# Altium PCB PCB1.PcbDoc
Units mil, origin at the board's own origin, x right, y up, seen from the top; angles counter-clockwise.
Board outline 3014.38 x 3014.38 mil, 2 copper layers (Top Layer, Bottom Layer); 25 components, 7 nets, 53 pads, 1 vias.
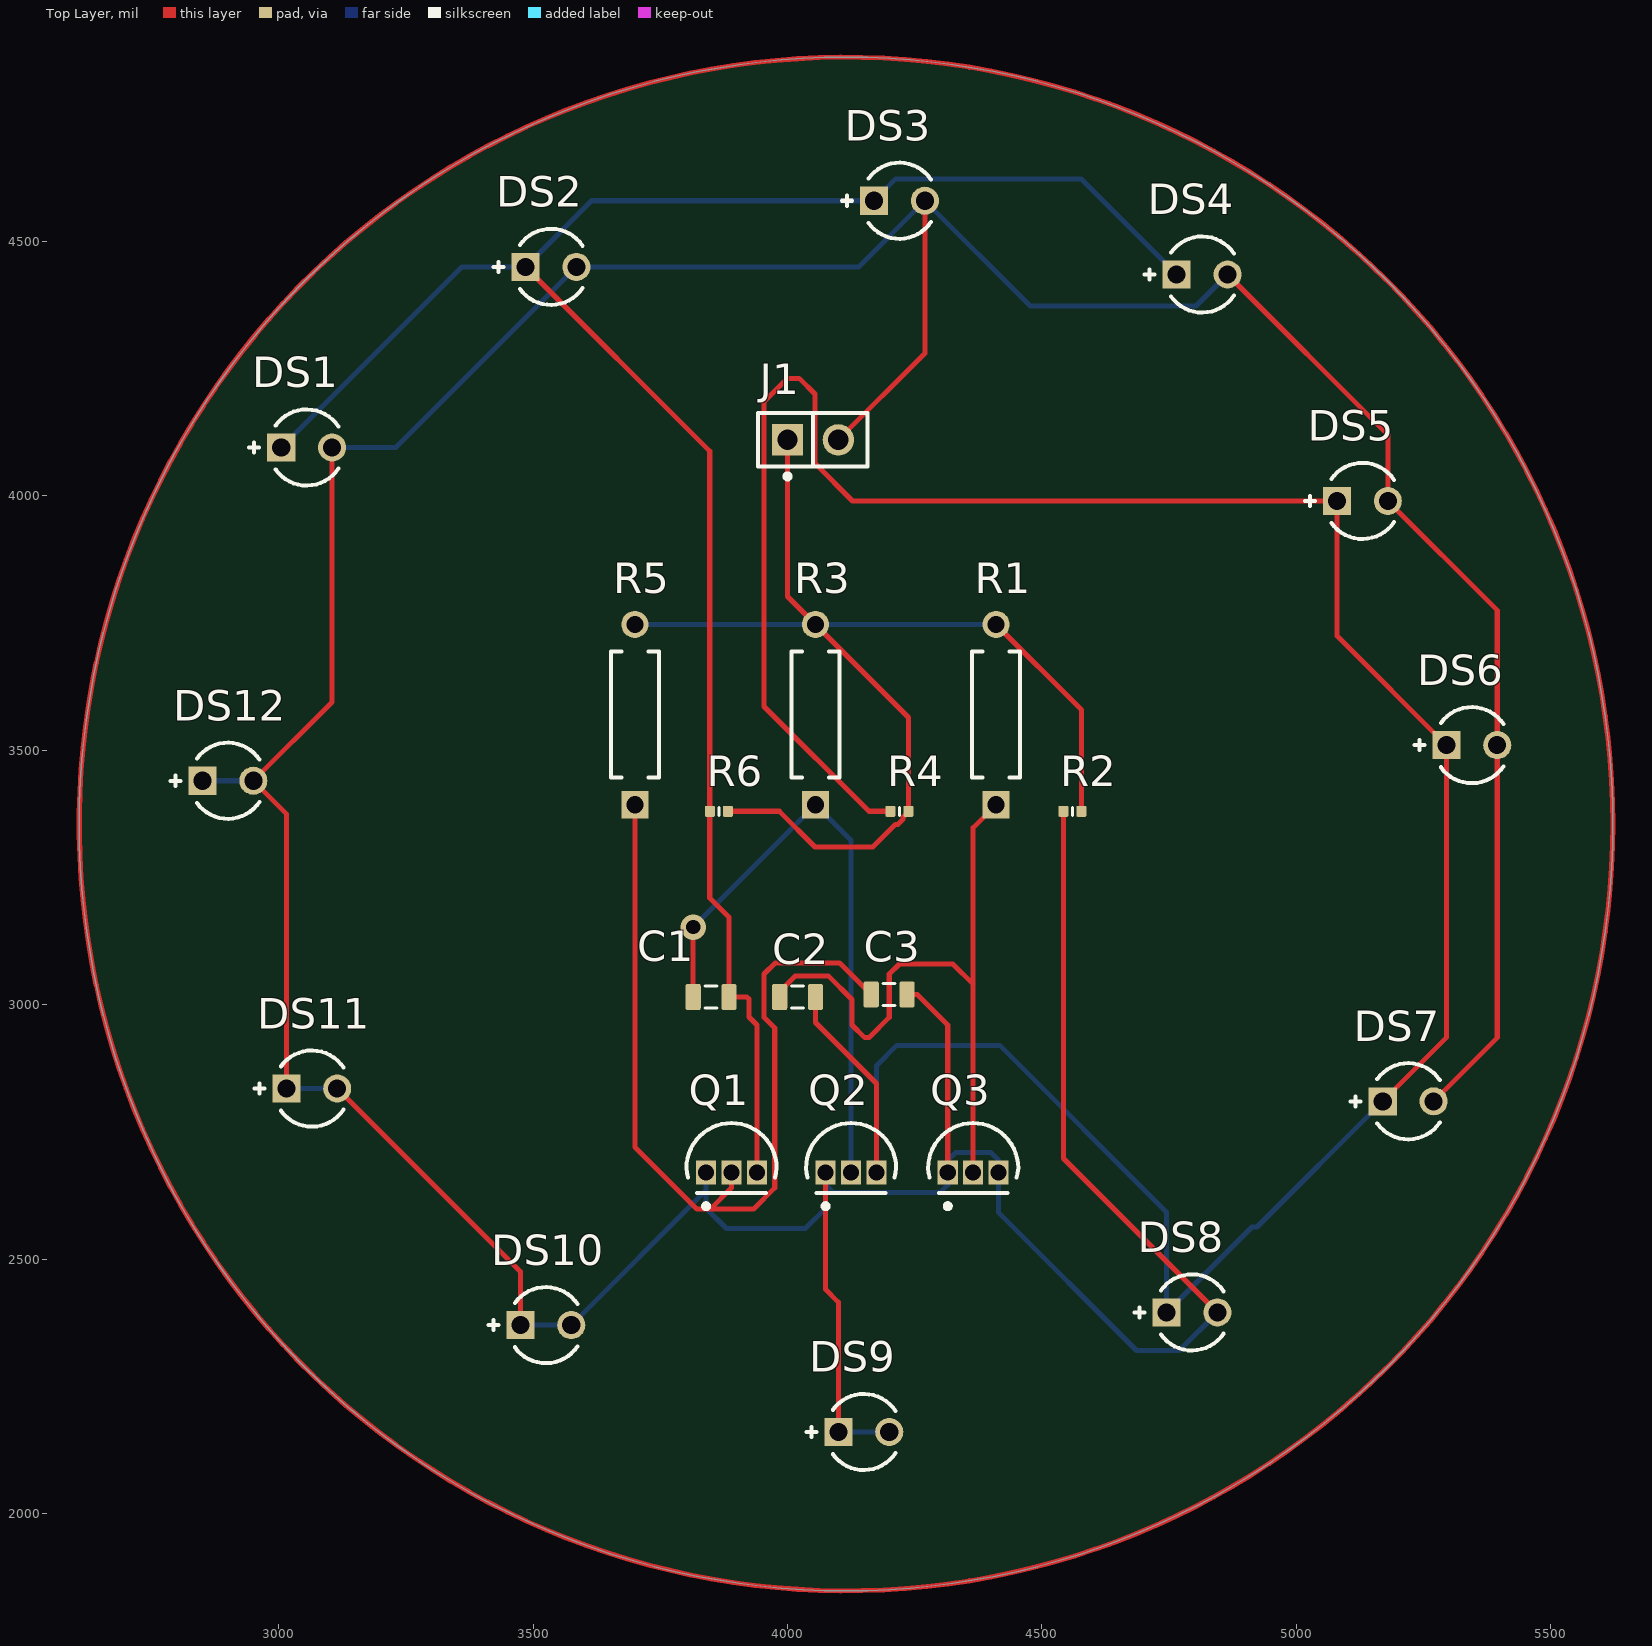
[diagram p0: Top Layer view]
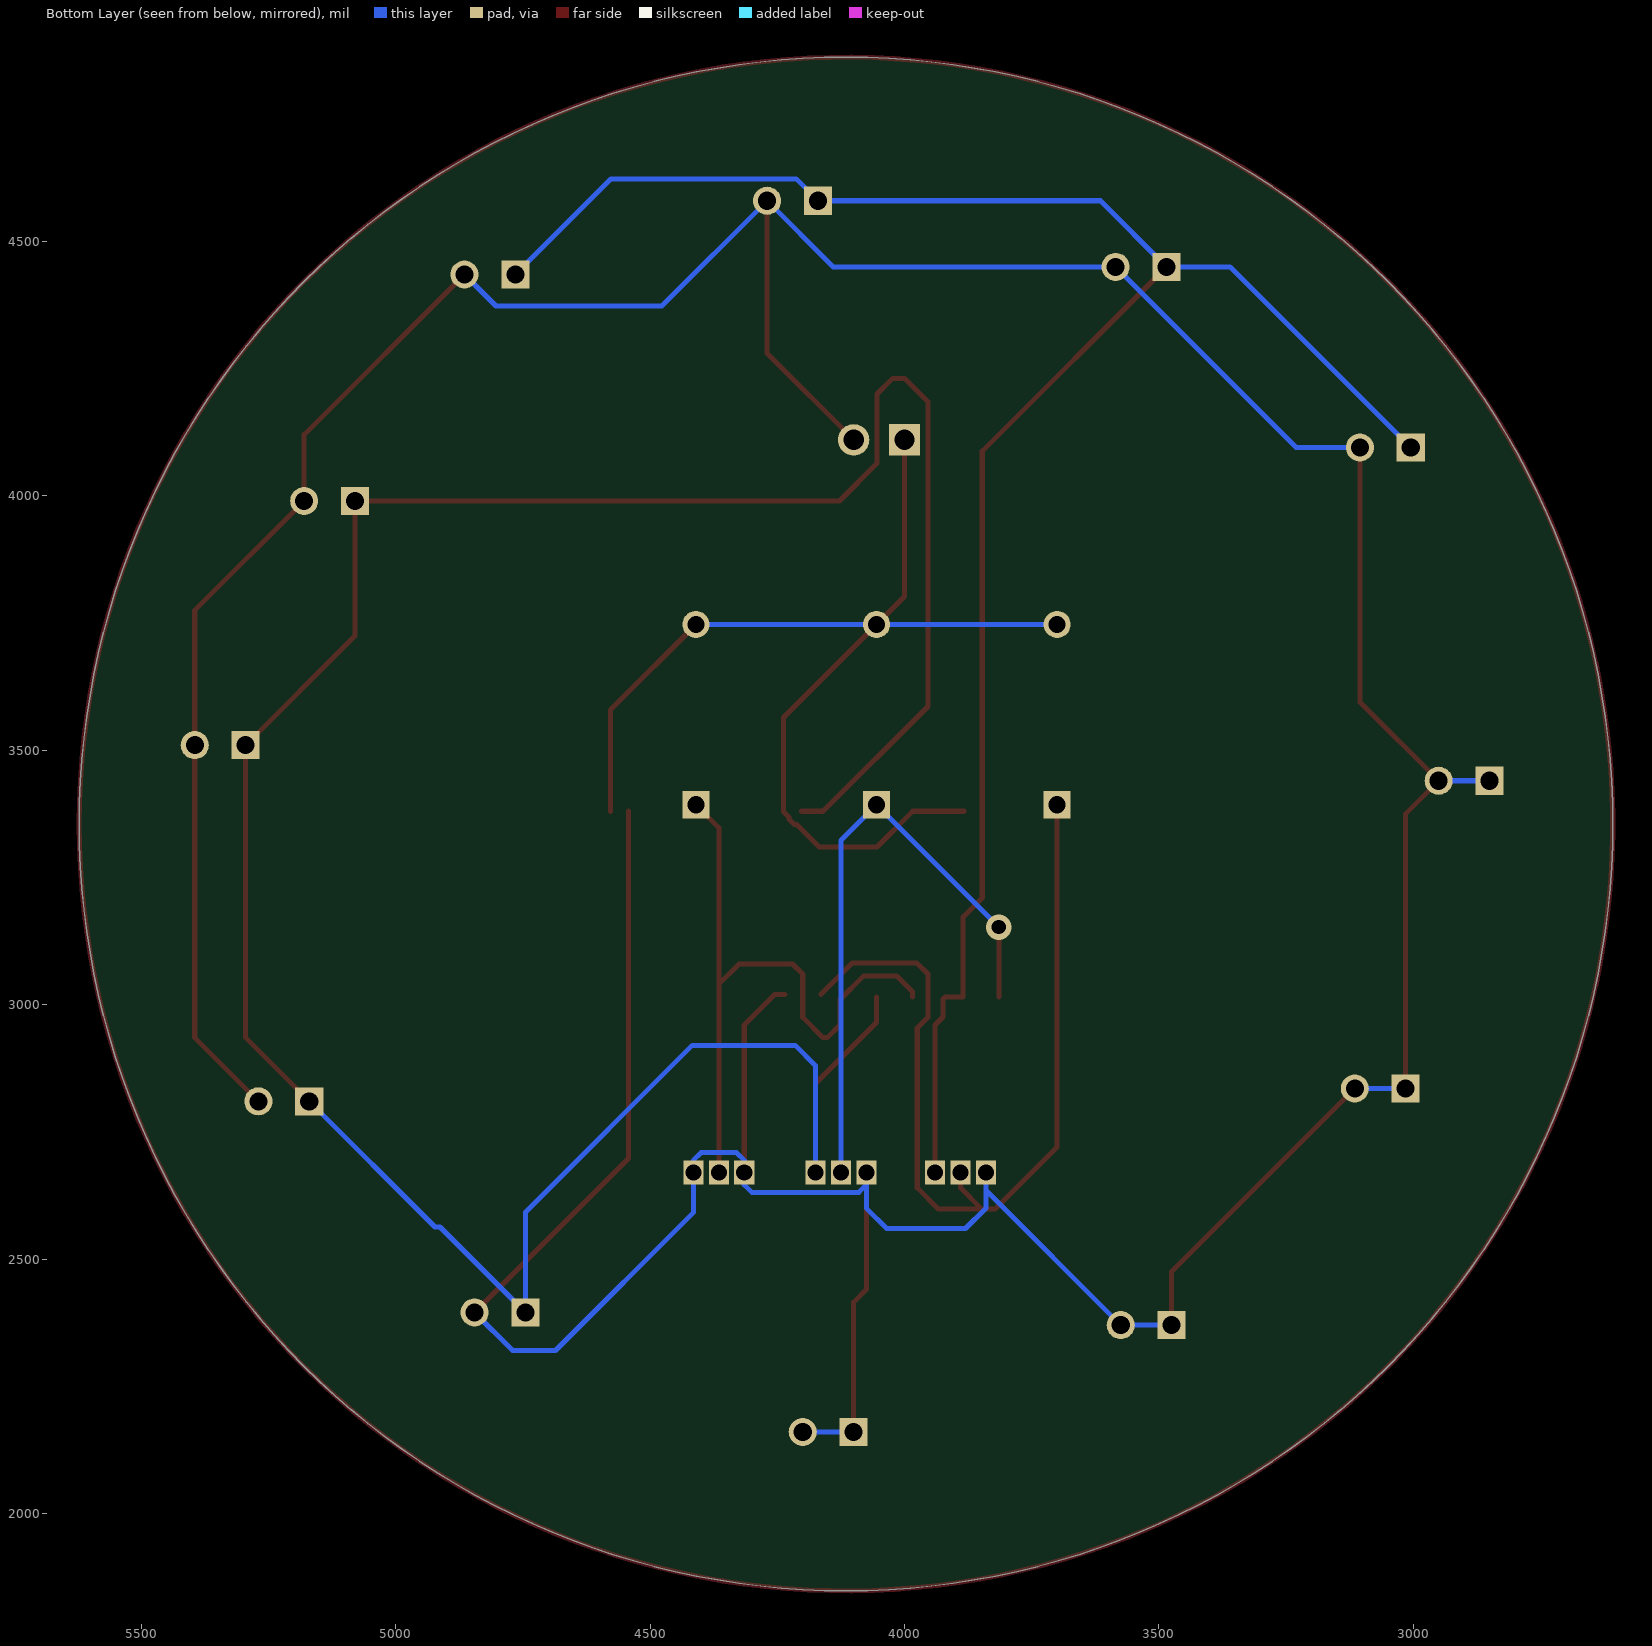
[diagram p1: Bottom Layer view, seen from below]

## Layer stack, top to bottom
Top Solder: solder mask 0.4, Solder Resist, Dk 3.5
Top Layer: signal copper 1.4
Dielectric 1: dielectric 12.6, FR-4, Dk 4.8
Bottom Layer: signal copper 1.4
Bottom Solder: solder mask 0.4, Solder Resist, Dk 3.5

## Board outline
2607.81,3355 ccw(c4115,3355) 4115,1847.81 ccw(c4115,3355) 5622.19,3355 ccw(c4115,3355) 4115,4862.19 ccw(c4115,3355)

## Design rules (kind name [scope] priority, off if disabled: settings)
Clearance [All] p1: gap=10 ignorepadtopadclearanceinfootprint=FALSE
PolygonConnect [All] p1: connectstyle=Relief reliefconductorwidth=10 reliefentries=4 polygonreliefangle="90 Angle" airgapwidth=10
RoutingVias [All] p1: holewidth=28 width=50 viastyle="Through Hole" minholewidth=28 minwidth=50 maxholewidth=28 maxwidth=50
SilkToSolderMaskClearance [IsPad] p1: minsilkscreentomaskgap=4 clearancetoexposedcopper=TRUE
SolderMaskExpansion [All] p1: expansion=0 istentingtop=FALSE
Width [All] p1: maxlimit=10 minlimit=10 preferedwidth=10
29 further rules are at their usual default settings.

## Components (designator, comment, footprint, x,y, rotation, side; value= is the part's Value field where it differs from the comment)
C1 "Capacitor 22µF +/-40% 16V 0805" CAPC0805(2012)145_L 3850,3015 r0 top value=22µF
C2 "Capacitor 22µF +/-40% 16V 0805" CAPC0805(2012)145_L 4020,3015 r0 top value=22µF
C3 "Capacitor 22µF +/-40% 16V 0805" CAPC0805(2012)145_L 4199.96,3020 r0 top value=22µF
DS1 "LTL-1CHE" INDPR60-254-520X380X650 3055,4095 r0 top
DS2 "LTL-1CHE" INDPR60-254-520X380X650 3535,4450 r0 top
DS3 "LTL-1CHE" INDPR60-254-520X380X650 4220,4580 r0 top
DS4 "LTL-1CHE" INDPR60-254-520X380X650 4815,4435 r0 top
DS5 "LTL-1CHE" INDPR60-254-520X380X650 5130,3990 r0 top
DS6 "LTL-1CHE" INDPR60-254-520X380X650 5345,3510 r0 top
DS7 "LTL-1CHE" INDPR60-254-520X380X650 5220,2810 r0 top
DS8 "LTL-1CHE" INDPR60-254-520X380X650 4795,2395 r0 top
DS9 "LTL-1CHE" INDPR60-254-520X380X650 4150,2160 r0 top
DS10 "LTL-1CHE" INDPR60-254-520X380X650 3525,2370 r0 top
DS11 "LTL-1CHE" INDPR60-254-520X380X650 3065,2835 r0 top
DS12 "LTL-1CHE" INDPR60-254-520X380X650 2900,3440 r0 top
J1 "TSW-102-14-G-S" FP-TSW-102-14-G-S-MFG 4050,4110 r0 top
Q1 "S9013" JSCJ-TO-92-3_V 3890,2670 r0 top
Q2 "S9013" JSCJ-TO-92-3_V 4125,2670 r0 top
Q3 "S9013" JSCJ-TO-92-3_V 4365,2670 r0 top
R1 "MFR-25FBF52-10K" RESA60-630X240 4410,3570 r90 top value=10k
R2 "Resistor 330R +/-5 % 0402 63 mW" RESC0402(1005)_L 4560,3380 r0 top value=330
R3 "MFR-25FBF52-10K" RESA60-630X240 4055,3570 r90 top value=10k
R4 "Resistor 330R +/-5 % 0402 63 mW" RESC0402(1005)_L 4220,3380 r0 top value=330
R5 "MFR-25FBF52-10K" RESA60-630X240 3700,3570 r90 top value=10k
R6 "Resistor 330R +/-5 % 0402 63 mW" RESC0402(1005)_L 3865,3380 r0 top value=330

## Footprints (in the part's own frame and the unit in brackets; to place one, negate y for a bottom-side part, rotate by r counter-clockwise, add the part's x,y. Pads: shape width x height; smd on the part's side, far side on the other; paste and mask are expansions set on the pad)
CAPC0805(2012)145_L [mm] "Chip Capacitor, Body 2.0x1.2mm, Height 1.45mm, IPC High Density"
  rrect25% 0.76x1.3 smd: 1(-0.9,0) 2(0.89,0)
  silkscreen extent -0.3,-0.55 0.3,0.55, body extent -1,-0.6 1,0.6, height 1.45
FP-TSW-102-14-G-S-MFG [mm]
  rect 1.57x1.57 hole 1.02 paste-2539.97 mask+0: 1(-1.27,0)
  round 1.57 hole 1.02 paste-2539.97 mask+0: 2(1.27,0)
  silkscreen extent -2.73,-1.95 2.73,1.34, body extent -2.83,-1.44 2.83,1.44, height 0.25
INDPR60-254-520X380X650 [mm] "THD, 2-Leads, Dia 3.8mm, Pitch 2.54mm"
  rect 1.4x1.4 hole 0.9: 1(-1.27,0)
  round 1.4 hole 0.9: 2(1.27,0)
  silkscreen extent -2.87,-1.9 1.58,1.9, body extent -1.9,-1.9 1.9,1.9, height 6.5
JSCJ-TO-92-3_V [mm] "TO-92, 3-leads, Height 4.7mm, Pitch 1.27mm"
  rect 1x1.2 hole 0.8: 1(-1.27,0) 2(0,0) 3(1.27,0)
  silkscreen extent -2.25,-1.81 2.25,2.47, body extent -2.25,-1.03 2.25,2.47, height 4.7
RESA60-630X240 [mm] "Axial Resistor, 2-Leads, Dia 2.4mm, Body Length 6.3mm"
  rect 1.35x1.35 hole 0.85: 1(-4.5,0)
  round 1.35 hole 0.85: 2(4.5,0)
  silkscreen extent -3.15,-1.2 3.15,1.2, body extent -4.77,-1.19 4.77,1.2, height 2.4
RESC0402(1005)_L [mm] "Chip Resistor, Body 1.0x0.5mm, IPC High Density"
  rrect25% 0.5x0.55 smd: 1(-0.45,0) 2(0.45,0)
  silkscreen extent 0,-0.2 0,0.2, body extent -0.5,-0.25 0.5,0.25, height 0.3

## Part data
C1 C2 C3: library part CMP-001-00081-4, "Chip Capacitor, 22µF +/-40%, 16V, 0805, Thickness 1.45 mm", Case/Package=0805, Max Operating Temperature=85°C, Min Operating Temperature=-55°C, Tolerance=5%, Voltage Rating=16V, Mounting Technology=SMT, Pins=2
DS1 DS2 DS3 DS4 DS5 DS6 DS7 DS8 DS9 DS10 DS11 DS12: library part CMP-007-00018-2, "LED Uni-Color Red, 100 mW, 30 mA, -55 to 100 degC, 2-Pin THD, RoHS, Bulk", Case/Package=Radial, Colour=Red, Forward Current=20mA, Forward Voltage=2V, Manufacturer=Lite-On, Max Operating Temperature=100°C, Min Operating Temperature=-55°C, Package Description="2-Pin Through Hole Device, Dia 3.8 mm, Pitch 2.54 mm", Package Quantity=1000, Datasheet URL=https://datasheet.ciiva.com/15117/getdatasheetpartid-187746-15117985.pdf, Datasheet Version=Dec-03, Illumination Colour=Red, Lens Style=Dome, Luminous Intensity=12.6mcd, Manufacturer URL=http://www.us.liteon.com/, Mounting Technology=TH, Nominal Vf=2V, Package Reference=LTL-1CHE, Packaging=Bulk, Pins=2, RoHS Compliant=True, Viewing Angle=60degrees
J1: library part CMP-002-00071-1, "TSW - Samtec 2.54mm Pin Header 13.46mm Overall Pin Length 2.79mm Tail (14) - Fast Stock(mcv)", Max Current Rating=7.6A, Max Operating Temperature=125°C, Min Operating Temperature=-55°C, Connector Type="Male Pin", Gender=Male, Mounting Technology="Through Hole", Pins=2
Q1 Q2 Q3: library part CMP-013-00000-3, "Transistor, NPN, 0.1 uA, 150 MHz, 3-Pin TO-92", Case/Package=TO-92-3, Manufacturer="Jiangsu Changjiang Electronics Technology", Package Description="3-Pin Through Hole Device, Height 4.7 mm, Pitch 2.3 mm", Datasheet URL=http://www.cj-elec.com/txUpfile/20121910315050632.pdf, Datasheet Version="Rev. B, 11/2011", Mounting Technology=TH, Package Reference=TO-92-3, RoHS Compliant=False
R1 R3 R5: library part CMP-009-00047-4, "Axial Resistor, 10 KOhm, +/- 1%, 0.25 W, -55 to 155 degC, 2-Pin THD, RoHS, Bulk", Case/Package=Axial, Manufacturer=Yageo, Max Operating Temperature=155°C, Min Operating Temperature=-55°C, Package Description="2-Pin Axial Lead, Dia 2.4 mm, Body Length 6.3 mm", Package Quantity=200, Package Reference=MFR-25, Power=250mW, Tolerance=1%, Voltage Rating=250V, Datasheet URL=http://www.yageo.com/documents/recent/Yageo%20LR_MFR_2013.pdf, Datasheet Version=Apr-13, Manufacturer URL=http://www.yageo.com/, Mounting Technology=TH, Packaging=Bulk, RoHS Compliant=True
R2 R4 R6: library part CMP-009-00132-3, "Chip Resistor, 330 Ohms, +/-5 %, 63 mW, -55 to 155 degC, 0402", Case/Package=0402, Max Operating Temperature=155°C, Min Operating Temperature=-55°C, Power=63mW, Tolerance=5%, Pins=2

## Via types
v1: diameter 50, hole 28, Top Layer to Bottom Layer, 1 vias

## Nets (pads, with @x,y where several pads share a name; then routed paths per layer and width w, separated by ;. In a path a pad name is that pad's centre, name@x,y a point inside that pad or via, vN(x,y) a via of type N, cw(c..) or ccw(c..) an arc to the next point about the centre after c; other vN are vias at no path point)
NetC1_1: C1.1 Q2.2 R3.1 | length 1229.3
  Top Layer w10: C1.1 v1(3814.57,3152.4)
  Bottom Layer w10: v1(3814.57,3152.4) R3.1 4125,3322.83 Q2.2
NetC1_2: C1.2 DS1.1 DS2.1 DS3.1 DS4.1 Q1.3 R6.1 | length 4045.5
  Top Layer w10: DS2.1 3847.28,4087.72 R6.1 3847.28,3209.47 3885.04,3171.72 C1.2 3920,3015 3924.16,3010.84 3924.16,2975.84 3940,2960 Q1.3
  Bottom Layer w10: DS1.1 3360,4450 DS2.1 3615,4580 DS3.1 4213,4623 4577,4623 DS4.1
NetC2_1: C2.1 Q3.2 R1.1 | length 1351.2
  Top Layer w10: C2.1 3984.57,3026 4014.57,3056 4081,3056 4127,3010 4127,2960 4152,2935 4160,2935 4200,2975 4200,3060 4220,3080 4325,3080 4365,3040 ; Q3.2 4365,3040 ; R1.1 4365,3347.83 4365,3040
NetC2_2: C2.2 DS5.1 DS6.1 DS7.1 DS8.1 Q2.3 R4.1 | length 5699
  Top Layer w10: C2.2 4055.04,2964.96 4175,2845 Q2.3 ; R4.1 4160,3380 3954,3586 3954,4185 4000,4231 4023,4231 4054,4200 4054,4064 4128,3990 DS5.1 5080,3725 DS6.1 5295,2935 DS7.1
  Bottom Layer w10: Q2.3 4175,2880 4215,2920 4417,2920 4745,2592 DS8.1 4913,2563 4923,2563 DS7.1
NetC3_1: C3.1 Q1.2 R5.1 | length 1779.2
  Top Layer w10: R5.1 3700,2720 3822,2598 3848,2598 ; Q1.2 3890,2640 3848,2598 ; C3.1 4102.53,3082 3976,3082 3954,3060 3954,2975 3975,2954 3975,2640 3933,2598 3848,2598
NetC3_2: C3.2 DS1.2 DS2.2 DS3.2 DS4.2 DS5.2 DS6.2 DS7.2 DS8.2 DS9.1 DS9.2 DS10.1 DS10.2 DS11.1 DS11.2 DS12.1 DS12.2 J1.2 Q1.1 Q2.1 Q3.1 Q3.3 R2.1 | length 10772
  Top Layer w10: DS11.1 3015,3375 DS12.2 3105,3595 DS1.2 ; DS11.2 3475,2475 DS10.1 ; Q2.1 4075,2440 4100,2415 DS9.1 ; J1.2 4270,4280 DS3.2 ; C3.2 4255,3020 4315,2960 Q3.1 ; R2.1 4542.28,2697.72 DS8.2 ; DS4.2 5180,4120 DS5.2 5395,3775 DS6.2 5395,2935 DS7.2
  Bottom Layer w10: DS12.1 DS12.2 ; DS11.1 DS11.2 ; DS1.2 3230,4095 DS2.2 4140,4450 DS3.2 4477,4373 4803,4373 DS4.2 ; DS10.1 DS10.2 3840,2635 ; Q1.1 3840,2635 ; Q2.1 4075,2646 ; DS9.1 DS9.2 ; DS8.2 4770,2320 4686,2320 4415,2591 Q3.3 4415,2694 4400,2709 4330,2709 4315,2694 Q3.1 4315,2646 4300,2631 4090,2631 4075,2646 ; 3840,2635 3840,2600 3880,2560 4035,2560 4075,2600 4075,2646
NetJ1_1: J1.1 R1.2 R2.2 R3.2 R4.2 R5.2 R6.2 | length 2391
  Top Layer w10: R6.2 3984,3380 4054,3310 4167.72,3310 4211.89,3354.17 4216.9,3354.17 4227.13,3364.4 4227.13,3368.43 4237.72,3379.02 4237.72,3564.45 R3.2 4000,3802.17 J1.1 ; R1.2 4577.72,3579.45 R2.2
  Bottom Layer w10: R5.2 R3.2 R1.2
copper on no net: | length 9470
  Top Layer w10: 5622.19,3355 ccw(c4115,3355) 5622.19,3355